# Altium PCB PCB1.PcbDoc
Units mm, origin at the board's own origin, x right, y up, seen from the top; angles counter-clockwise.
Board outline 127 x 101.6 mm, 2 copper layers (Top Layer, Bottom Layer); 84 components, 61 nets, 302 pads, 46 vias.
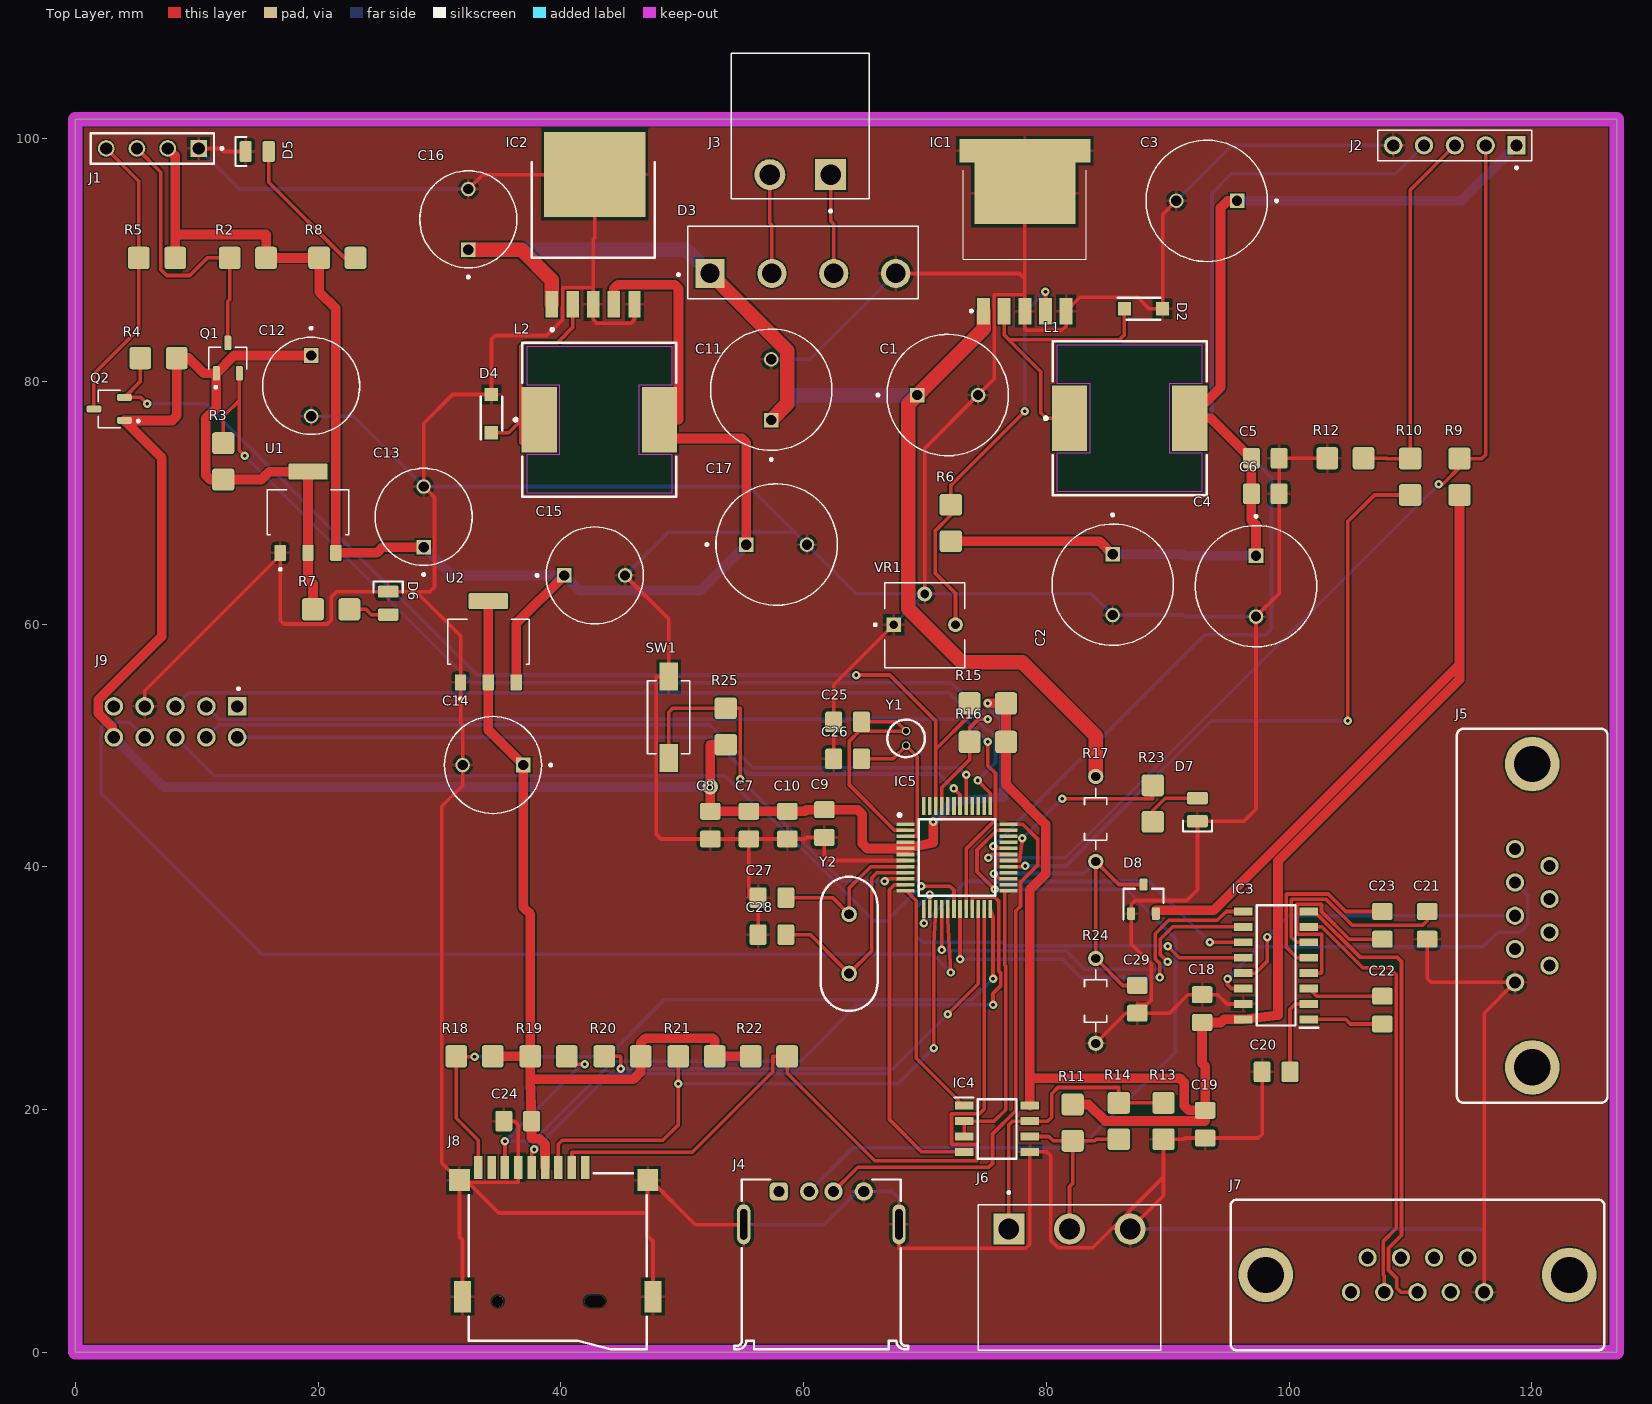
[diagram p0: Top Layer view]
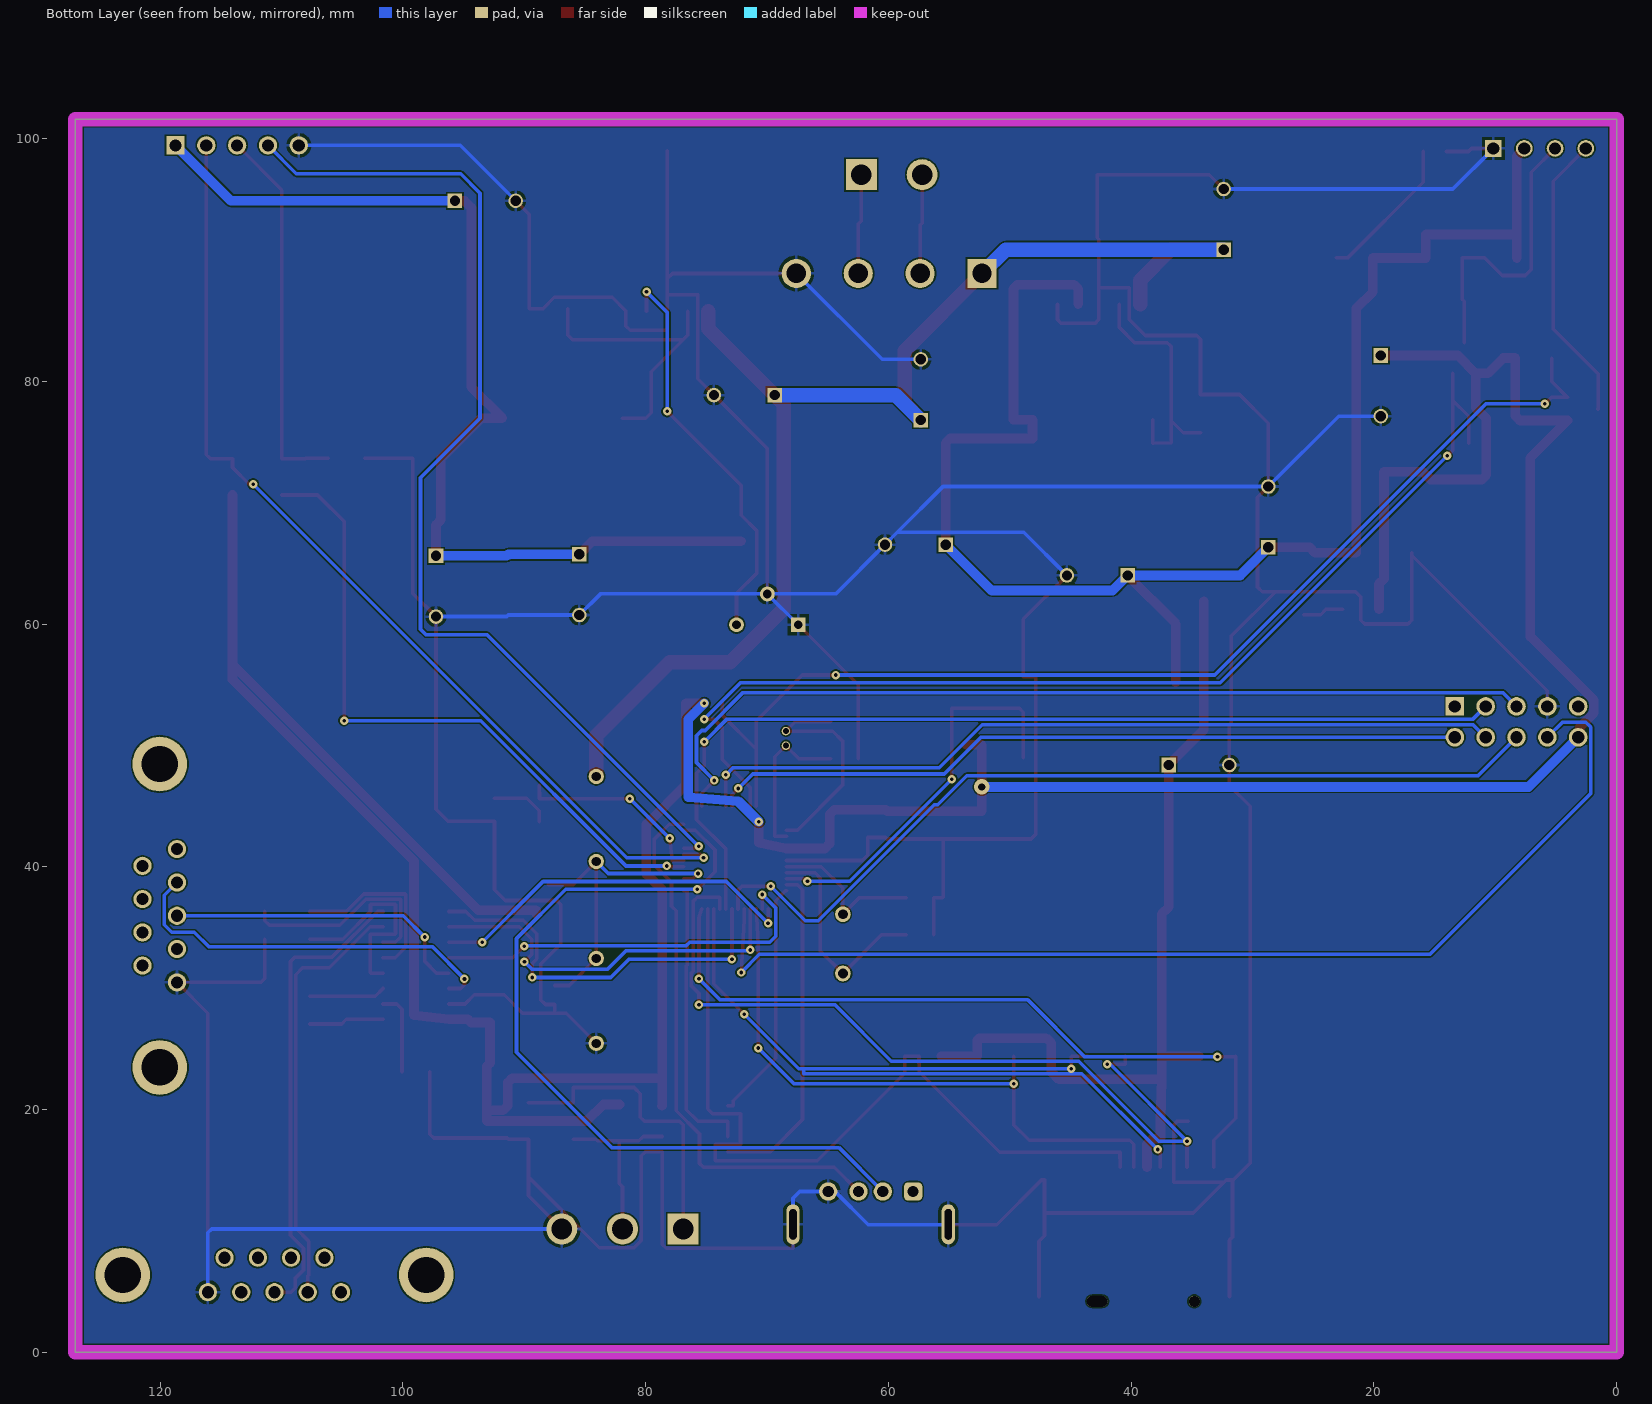
[diagram p1: Bottom Layer view, seen from below]
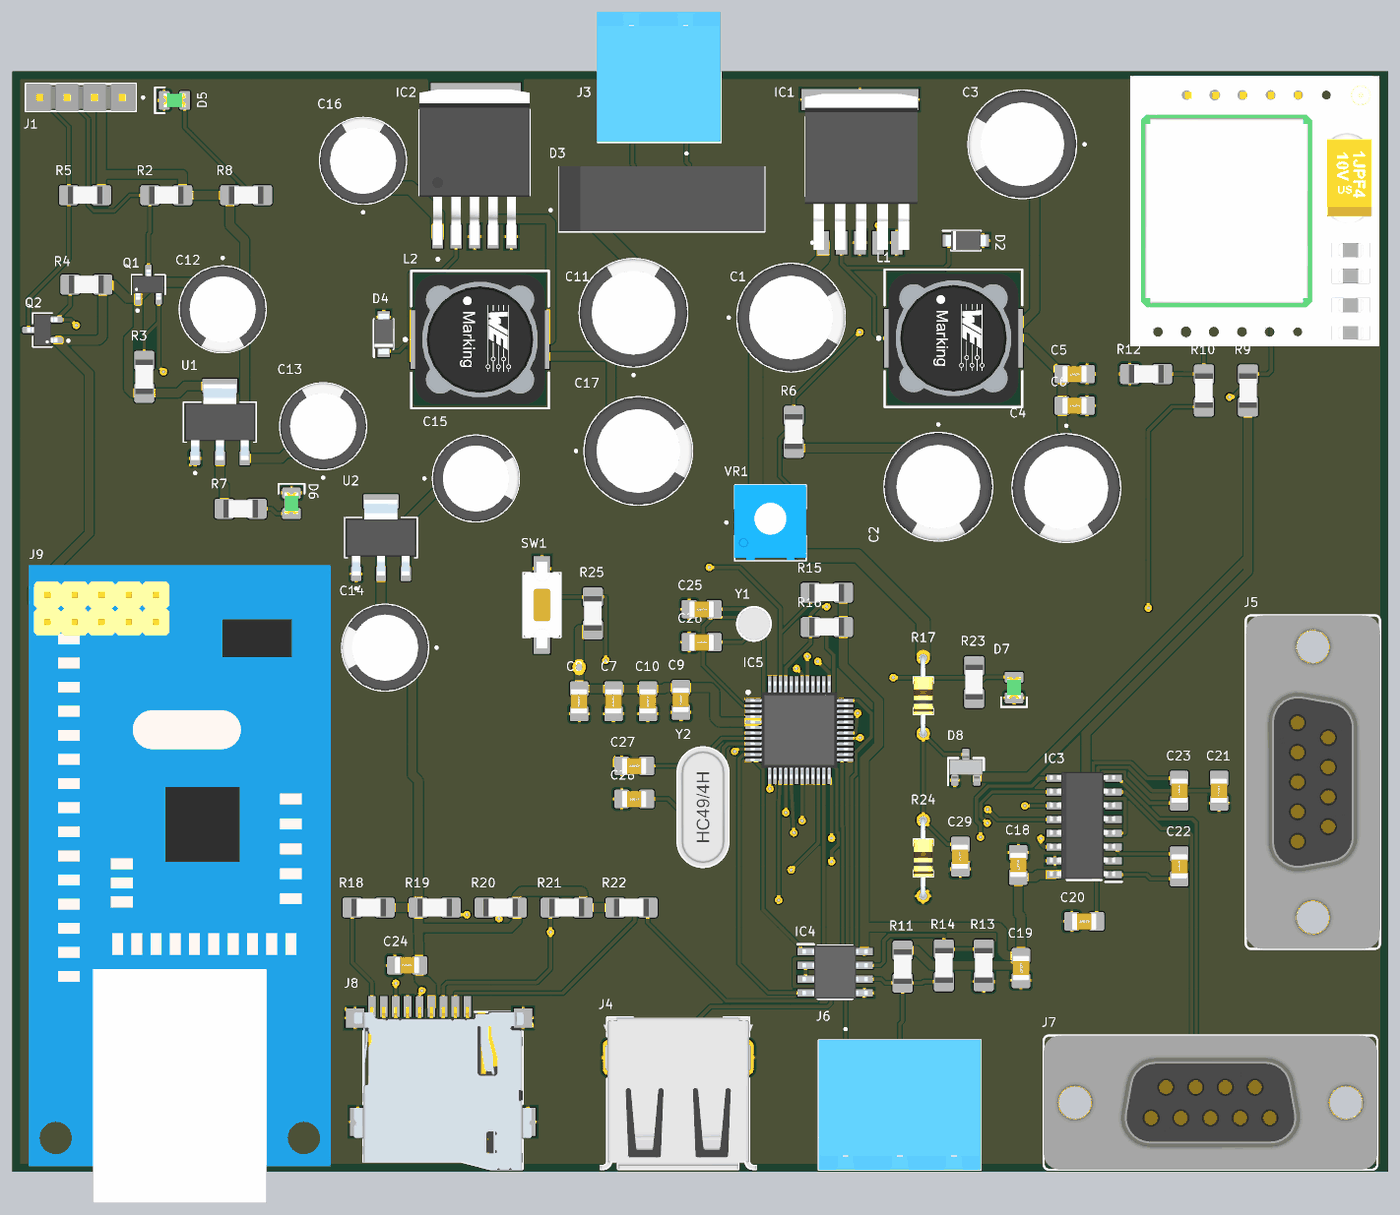
[diagram p2: 3D render of the assembled board from above, using the file's embedded part models]

## Layer stack, top to bottom
Top Solder: solder mask 0.0102, Solder Resist, Dk 3.5
Top Layer: signal copper 0.0356
Dielectric 1: dielectric 0.32, FR-4, Dk 4.8
Bottom Layer: signal copper 0.0356
Bottom Solder: solder mask 0.0102, Solder Resist, Dk 3.5

## Board outline
0,101.6 127,101.6 127,0 0,0

## Design rules (kind name [scope] priority, off if disabled: settings)
Clearance Clearance_MCU [InComponent('IC5')] p1: gap=0.05 ignorepadtopadclearanceinfootprint=TRUE except(0: Arc-Hole Track-Hole SMDPad-Hole THPad-Hole Via-Hole Fill-Hole Poly-Hole Region-Hole Text-Hole)
Clearance [All] p2: gap=0.12 ignorepadtopadclearanceinfootprint=TRUE except(0: Arc-Hole Track-Hole SMDPad-Hole THPad-Hole Via-Hole Fill-Hole Poly-Hole Region-Hole Text-Hole)
HoleSize [All] p1: absolutevalues=TRUE maxlimit=5 minlimit=0.025 maxpercent=80.000 minpercent=20.000
MinimumSolderMaskSliver [All] p1 off: minsoldermaskwidth=0.1
PolygonConnect [All] p1: connectstyle=Relief reliefconductorwidth=0.254 reliefentries=4 polygonreliefangle="90 Angle" airgapwidth=0.254
RoutingVias RoutingVias_1 [InNet('24V') OR InNet('4.3V') OR InNet('5V') OR InNet('3.3V') OR InNet('3.3V_Comm')] p1: holewidth=0.6 width=1.27 viastyle="Through Hole" minholewidth=0.6 minwidth=1.27 maxholewidth=0.6 maxwidth=1.27
RoutingVias [All] p2: holewidth=0.3 width=0.7 viastyle="Through Hole" minholewidth=0.3 minwidth=0.7 maxholewidth=0.3 maxwidth=0.7
SilkToSilkClearance [All] p1 off: silktosilkclearance=0.254
SilkToSolderMaskClearance [IsPad] p1 off: minsilkscreentomaskgap=0.1 clearancetoexposedcopper=TRUE
SolderMaskExpansion [All] p1: expansion=0.102 istentingtop=FALSE
Width Width_Power [InNet('24V')] p1: maxlimit=2 minlimit=1 preferedwidth=1.2
Width Width_Power_Med [InNet('4.3V') OR InNet('5V') OR InNet('3.3V') OR InNet('3.3V_Comm')] p2: maxlimit=1.2 minlimit=0.6 preferedwidth=0.8
Width Width_Signals [All] p3: maxlimit=0.4 minlimit=0.15 preferedwidth=0.3
Width [All] p4: maxlimit=0.4 minlimit=0.15 preferedwidth=0.254
26 further rules are at their usual default settings.

## Classes and differential pairs
component class Sheet2: C18 C19 C20 C21 C22 C23 C24 C25 C26 C27 C28 C29 D7 D8 IC3 IC4 IC5 J2 J4 J5 J6 J7 J8 J9 R9 R10 R11 R12 R13 R14 R15 R16 R17 R18 R19 R20 R21 R22 R23 R24 R25 SW1 Y1 Y2
component class Sheet1: C1 C2 C3 C4 C5 C6 C7 C8 C9 C10 C11 C12 C13 C14 C15 C16 C17 D2 D3 D4 D5 D6 IC1 IC2 J1 J3 L1 L2 Q1 Q2 R2 R3 R4 R5 R6 R7 R8 U1 U2 VR1

## Components (designator, comment, footprint, x,y, rotation, side; value= is the part's Value field where it differs from the comment)
C1 "470uF" CAPPRD500W60D1000H1600 71.882,78.867 r0 top
C2 "1000uF" CAPPRD500W60D1000H2500 85.471,63.246 r270 top
C3 "680uF" CAPPRD500W60D1000H1600 93.218,94.869 r180 top
C4 "470uF" CAPPRD500W60D1000H1600 97.282,63.119 r270 top
C5 "0.1uF" CAP_0805 98.044,73.66 r180 top
C6 "0.1uF" CAP_0805 98.044,70.739 r180 top
C7 "0.1uF" CAP_0805 55.499,43.434 r90 top
C8 "0.1uF" CAP_0805 52.324,43.434 r90 top
C9 "0.1uF" CAP_0805 61.722,43.561 r90 top
C10 "0.1uF" CAP_0805 58.674,43.434 r90 top
C11 "470uF" CAPPRD500W60D1000H1600 57.342,79.31 r90 top
C12 "220uF" CAPPRD500W60D800H1150 19.431,79.629 r270 top
C13 "220uF" CAPPRD500W60D800H1150 28.702,68.834 r90 top
C14 "220uF" CAPPRD500W60D800H1150 34.417,48.387 r180 top
C15 "220uF" CAPPRD500W60D800H1150 42.799,64.008 r0 top
C16 "220uF" CAPPRD500W60D800H1150 32.385,93.345 r90 top
C17 "680uF" CAPPRD500W60D1000H1600 57.785,66.548 r0 top
C18 "0.1uF" CAP_0805 92.837,28.321 r270 top
C19 "0.1uF" CAP_0805 93.091,18.796 r270 top
C20 "0.1uF" CAP_0805 98.933,23.114 r180 top
C21 "0.1uF" CAP_0805 111.379,35.179 r90 top
C22 "0.1uF" CAP_0805 107.696,28.194 r270 top
C23 "0.1uF" CAP_0805 107.696,35.179 r270 top
C24 "0.1uF" CAP_0805 36.449,19.05 r0 top
C25 "0.1uF" CAP_0805 63.627,51.943 r180 top
C26 "0.1uF" CAP_0805 63.627,48.895 r180 top
C27 "0.1uF" CAP_0805 57.404,37.465 r180 top
C28 "0.1uF" CAP_0805 57.404,34.417 r180 top
C29 "0.1uF" CAP_0805 87.503,29.083 r90 top
D2 "SS34LWHRVG" SODFL3718X102N 88.011,85.979 r0 top
D3 "KBL606G" SIP600W130P510L1900H1630Q4 59.944,89.789 r0 top
D4 "SS34LWHRVG" SODFL3718X102N 34.29,77.343 r90 top
D5 "GREEN" LED_0805_GREEN 14.986,98.933 r0 top
D6 "GREEN" LED_0805_GREEN 25.781,61.722 r270 top
D7 "GREEN" LED_0805_GREEN 92.456,44.704 r90 top
D8 "Schottky-Dual-Diode_Series" SOT-23 88.011,37.338 r90 top value=Schottky-Dual-Diode
IC1 "LM2596S-ADJ" LM2596SXADJ 78.232,92.327 r270 top
IC2 "LM2596S-5.0" KTT0005B 42.672,98.806 r270 top
IC3 "MAX3232ESE+" SOIC127P600X175-16N 98.933,31.877 r180 top
IC4 "MAX3485EESA+" SOIC127P600X175-8N 75.946,18.415 r0 top
IC5 "STM32G071CBT6TR" QFP50P900X900X160-48N 72.644,40.767 r0 top
J1 "MTSW-104-08-S-S-270" SAMTEC_MTSW-104-08-S-S-270 6.35,99.187 r0 top
J2 "826646-5" TE_826646-5 113.665,99.441 r180 top
J3 "TBP04R12-500-02BE" CUI_TBP04R12-500-02BE 62.23,97.028 r180 top
J4 "61410416021R" 61410416021R 61.468,7.239 r0 top
J5 "Female, Straight, 9p" 210611003 120.038,35.97 r90 top
J6 "TBP04R1-500-03BE" *CUI_TBP04R1-500-03BE 76.915,10.16 r0 top
J7 "Female, Straight, 9p" 210611003 110.588,6.373 r180 top
J8 "693071020811" 693071020811 39.751,7.493 r0 top
J9 "ZST-105-XX-X-D-XXX" SAMTEC_ZST-105-XX-X-D-XXX 8.255,51.943 r180 top
L1 "470µH" "WE-PD HV_1210" 86.868,76.962 r270 top
L2 "470µH" "WE-PD HV_1210" 43.18,76.835 r270 top
Q1 "AO3402" SOT95P280X125-3N 12.573,81.915 r90 top
Q2 "AO3402" SOT95P280X125-3N 2.794,77.724 r180 top
R2 "10k" RES_1206 14.224,90.17 r180 top
R3 "10k" RES_1206 12.192,73.406 r90 top
R4 "10k" RES_1206 6.858,81.915 r180 top
R5 "10k" RES_1206 6.731,90.17 r180 top
R6 "1k" RES_1206 72.136,68.326 r270 top
R7 "1k" RES_1206 21.082,61.214 r0 top
R8 "1k" RES_1206 21.59,90.17 r0 top
R9 "10k" RES_1206 114.046,72.136 r270 top
R10 "1k" RES_1206 109.982,72.136 r90 top
R11 "10k" RES_1206 82.169,18.923 r270 top
R12 "2.2k" RES_1206 104.648,73.66 r0 top
R13 "10k" RES_1206 89.662,19.05 r90 top
R14 "120" RES_1206 85.979,19.05 r270 top
R15 "4.7k" RES_1206 75.184,53.467 r180 top
R16 "4.7k" RES_1206 75.184,50.292 r180 top
R17 "3-1623927-1" RESAD700W45L350D185 84.074,43.942 r270 top value=100k
R18 "10k" RES_1206 32.893,24.384 r0 top
R19 "10k" RES_1206 38.989,24.384 r180 top
R20 "10k" RES_1206 45.085,24.384 r0 top
R21 "10k" RES_1206 51.181,24.384 r0 top
R22 "10k" RES_1206 57.15,24.384 r180 top
R23 "220" RES_1206 88.773,45.212 r90 top
R24 "3-1623927-1" RESAD700W45L350D185 84.074,28.956 r270 top value=10k
R25 "10k" RES_1206 53.594,51.562 r270 top
SW1 "434121043816" 434121043816 48.895,52.324 r270 top
U1 "AMS1117" SOT229P700X180-4N 19.177,69.215 r90 top
U2 "AMS1117" SOT229P700X180-4N 34.036,58.547 r90 top
VR1 "3362P-1-103" TRIM_3362P-1-103 69.977,59.944 r0 top
Y1 "32.768kHz" WE-XTAL_WATCH_D3H8.2 68.453,50.581 r90 top
Y2 "10MHz" WE-XTAL_HC49/4H 63.754,33.655 r90 top

## Footprints (in the part's own frame and the unit in brackets; to place one, negate y for a bottom-side part, rotate by r counter-clockwise, add the part's x,y. Pads: shape width x height; smd on the part's side, far side on the other; paste and mask are expansions set on the pad)
210611003 [mm] "D-SUB-Filter, Solder Pin Straight, Female, 09p"
  round 1.5 hole 1: 1(5.49,1.42) 2(2.74,1.42) 3(0,1.42) 4(-2.74,1.42) 5(-5.49,1.42) 6(4.11,-1.42) 7(1.37,-1.42) 8(-1.37,-1.42) 9(-4.11,-1.42)
  round 4.5 hole 3: M1(-12.5,0) M2(12.5,0)
  silkscreen extent -15.4,-6.2 15.4,6.2, body extent -15.4,-6.2 15.4,6.2, height 11.9
61410416021R [mm] "USB Type A Horizontal THR"
  rrect50% 1.52x1.52 hole 0.92: 1(-3.5,6.01)
  round 1.52 hole 0.92: 2(-1,6.01) 3(1,6.01) 4(3.5,6.01)
  oval 1.1x3.3 hole 0.6 slot 2.5 at 90 deg: Shell(-6.4,3.3) Shell(6.4,3.3)
  silkscreen extent -7.17,-7 7.17,7, body extent -7.22,-7 7.23,7, height 7.55
434121043816 [mm] "SMD Tact Switch, body 6x3.5mm"
  rect 2.3x1.5 smd: 1(-3.35,0) 2(3.35,0)
  silkscreen extent -3,-1.75 3,1.75, body extent -4,-1.75 4,1.75, height 4.3
693071020811 [mm] "Micro SD Card Connector Push & Push - with Card Detection - 8 Pins"
  rect 0.7x1.9 smd: 1(2.25,7.75) 2(1.15,7.75) 3(0.05,7.75) 4(-1.05,7.75) 5(-2.15,7.75) 6(-3.25,7.75) 7(-4.35,7.75) 8(-5.45,7.75) 9(-6.55,7.75)
  rect 1.7x1.8 smd: 10(-8.1,6.7) 11(7.4,6.7)
  rect 1.4x2.6 smd: 12(-7.85,-2.9) 13(7.85,-2.9)
  round 0.9 hole 0.9 unplated: MH1(-4.95,-3.3)
  oval 1.7x0.9 hole 0.9 slot 1.7 at 0 deg unplated: MH2(3.05,-3.3)
  silkscreen extent -7.35,-7.25 7.35,7.25, body extent -8.2,-7.3 8.2,7.73, height 1.85
*CUI_TBP04R1-500-03BE [mm]
  rect 2.55x2.55 hole 1.7: 1(0,0)
  round 2.55 hole 1.7: 2(5,0) 3(10,0)
  silkscreen extent -2.5,-10 12.5,3.1, body extent -2.51,-9.98 12.49,2.02, height 9.05
CAP_0805 [mm]
  rrect25% 1.4x1.7 smd: 1(-1.143,0) 2(1.143,0)
  body extent -1.15,-0.76 1.15,0.79, height 1.01
CAPPRD500W60D800H1150 [mm]
  round 1.2 hole 0.85: N(2.5,0)
  rect 1.2x1.2 hole 0.85: P(-2.5,0)
  silkscreen extent -4.85,-4 4,4, body extent -4,-4 4,4, height 11.5
CAPPRD500W60D1000H1600 [mm]
  round 1.2 hole 0.85: N(2.5,0)
  rect 1.2x1.2 / inner round 1.2 / far side rect 1.2x1.2 hole 0.85: P(-2.5,0)
  silkscreen extent -5.85,-5 5,5, body extent -5,-5 5,5, height 16
CAPPRD500W60D1000H2500 [mm]
  round 1.2 hole 0.85: N(2.5,0)
  rect 1.2x1.2 hole 0.85: P(-2.5,0)
  silkscreen extent -5.85,-5 5,5, body extent -5,-5 5,5, height 25
CUI_TBP04R12-500-02BE [mm]
  rect 2.55x2.55 / inner round 2.55 / far side rect 2.55x2.55 hole 1.7: 1(0,0)
  round 2.55 hole 1.7: 2(5,0)
  silkscreen extent -3.2,-10 8.2,3.1, body extent -3.11,-10.06 8.29,1.93, height 9.25
KTT0005B [mm]
  rect 2.16x1.02 smd: 1(12.461,-3.4) 2(12.461,-1.7) 3(12.461,0) 4(12.461,1.7) 5(12.461,3.4)
  rect 6.99x8.33 smd: 6(1.778,0.127)
  silkscreen extent 0.76,-5.08 14.68,5.08, body extent -1.11,-5.08 13.24,5.08, height 4.72
LED_0805_GREEN [mm]
  rrect25% 1x1.7 smd: A(0.95,0) K(-0.95,0)
  silkscreen extent -1.8,-1.2 -0.9,1.2, body extent -1,-0.63 1,0.63, height 1.12
LM2596SXADJ [mm]
  rect 2.16x1.07 smd: 1(6.545,-3.4) 2(6.545,-1.7) 3(6.545,0) 4(6.545,1.7) 5(6.545,3.4)
  rect 1.91x10.8 smd: T1(-6.67,0)
  rect 5.08x8.33 smd: T2(-3.175,0)
  silkscreen extent -5.06,-5.08 6.64,5.08, body extent -7.2,-5.07 7.19,5.34, height 4.8
QFP50P900X900X160-48N [mm]
  rect 1.475x0.3 smd: 1(-4.238,2.75) 2(-4.238,2.25) 3(-4.238,1.75) 4(-4.238,1.25) 5(-4.238,0.75) 6(-4.238,0.25) 7(-4.238,-0.25) 8(-4.238,-0.75) 9(-4.238,-1.25) 10(-4.238,-1.75) 11(-4.238,-2.25) 12(-4.238,-2.75) 25(4.238,-2.75) 26(4.238,-2.25) 27(4.238,-1.75) 28(4.238,-1.25) 29(4.238,-0.75) 30(4.238,-0.25) 31(4.238,0.25) 32(4.238,0.75) 33(4.238,1.25) 34(4.238,1.75) 35(4.238,2.25) 36(4.238,2.75)
  rect 0.3x1.475 smd: 13(-2.75,-4.238) 14(-2.25,-4.238) 15(-1.75,-4.238) 16(-1.25,-4.238) 17(-0.75,-4.238) 18(-0.25,-4.238) 19(0.25,-4.238) 20(0.75,-4.238) 21(1.25,-4.238) 22(1.75,-4.238) 23(2.25,-4.238) 24(2.75,-4.238) 37(2.75,4.238) 38(2.25,4.238) 39(1.75,4.238) 40(1.25,4.238) 41(0.75,4.238) 42(0.25,4.238) 43(-0.25,4.238) 44(-0.75,4.238) 45(-1.25,4.238) 46(-1.75,4.238) 47(-2.25,4.238) 48(-2.75,4.238)
  silkscreen extent -4.85,-3.15 3.15,3.62, body extent -4.5,-4.5 4.5,4.5, height 1.6
RES_1206 [mm]
  rrect25% 1.8x1.84 smd: 1(-1.5,0) 2(1.5,0)
  body extent -1.6,-0.83 1.6,0.83, height 0.57
RESAD700W45L350D185 [mm]
  round 1.258 hole 0.75: 1(-3.5,0) 2(3.5,0)
  silkscreen extent -2.55,-0.93 2.55,0.93, body extent -3.72,-0.92 3.72,0.92, height 1.85
SAMTEC_MTSW-104-08-S-S-270 [mm]
  rect 1.37x1.37 / inner round 1.37 / far side rect 1.37x1.37 hole 1.02: 01(3.81,0)
  round 1.37 hole 1.02: 02(1.27,0) 03(-1.27,0) 04(-3.81,0)
  silkscreen extent -5.08,-1.27 5.83,1.27, body extent -5.08,-1.27 5.08,1.27, height 9.4
SAMTEC_ZST-105-XX-X-D-XXX [mm]
  rect 1.53x1.53 / inner round 1.53 / far side rect 1.53x1.53 hole 1.02 mask+0.102: 01(-5.08,-1.27)
  round 1.53 hole 1.02 mask+0.102: 02(-5.08,1.27) 03(-2.54,-1.27) 04(-2.54,1.27) 05(0,-1.27) 06(0,1.27) 07(2.54,-1.27) 08(2.54,1.27) 09(5.08,-1.27) 10(5.08,1.27)
  silkscreen extent -5.3,-2.83 -5.1,-2.63, body extent -21.17,-4.06 6.73,54.84, height 15.56
SIP600W130P510L1900H1630Q4 [mm]
  round 2.4 hole 1.6: AC1(-2.55,-0.9) AC2(2.55,-0.9) NEG(7.65,-0.9)
  rect 2.4x2.4 hole 1.6: POS(-7.65,-0.9)
  silkscreen extent -10.35,-3 9.5,3, body extent -9.5,-2.95 9.5,3.05, height 16.3
SODFL3718X102N [mm]
  rect 1.09x1.11 smd: 1(-1.575,0) 2(1.575,0)
  silkscreen extent -2.12,-0.9 1.38,0.9, body extent -1.85,-0.9 1.85,0.9, height 1.02
SOIC127P600X175-8N [mm]
  rect 1.525x0.65 smd: 1(-2.712,1.905) 2(-2.712,0.635) 3(-2.712,-0.635) 4(-2.712,-1.905) 5(2.712,-1.905) 6(2.712,-0.635) 7(2.712,0.635) 8(2.712,1.905)
  silkscreen extent -3.47,-2.45 1.6,2.58, body extent -3,-2.45 3,2.45, height 1.75
SOIC127P600X175-16N [mm]
  rect 1.525x0.65 smd: 1(-2.712,4.445) 2(-2.712,3.175) 3(-2.712,1.905) 4(-2.712,0.635) 5(-2.712,-0.635) 6(-2.712,-1.905) 7(-2.712,-3.175) 8(-2.712,-4.445) 9(2.712,-4.445) 10(2.712,-3.175) 11(2.712,-1.905) 12(2.712,-0.635) 13(2.712,0.635) 14(2.712,1.905) 15(2.712,3.175) 16(2.712,4.445)
  silkscreen extent -3.48,-4.95 1.6,5.12, body extent -2.84,-5.03 3.16,4.87, height 1.73
SOT95P280X125-3N [mm]
  rrect50% 1.21x0.59 smd: 1(-1.255,0.95) 2(-1.255,-0.95) 3(1.255,0)
  silkscreen extent -2.5,-1.56 0.9,1.56, body extent -1.4,-1.45 1.4,1.45, height 1.25
SOT229P700X180-4N [mm]
  rrect15% 1.31x0.93 smd: 1(-3.345,2.29) 2(-3.345,0) 3(-3.345,-2.29)
  rrect15% 1.31x3.24 smd: 4(3.345,0)
  silkscreen extent -4.8,-3.36 1.86,3.36, body extent -3.5,-3.25 3.5,3.25, height 1.8
SOT-23 [mm] "SOT23, 3-Leads, IPC Medium Density, TO-236"
  rrect25% 1x0.65 smd: 1(-1.2,1.02) 2(-1.2,-1.02) 3(1.2,0)
  silkscreen extent -1.65,-1.65 0.85,1.65, body extent -1.3,-1.52 1.3,1.52, height 1.3
TE_826646-5 [mm]
  rect 1.508x1.508 / inner round 1.508 / far side rect 1.508x1.508 hole 1: 1(-5.08,0)
  round 1.508 hole 1: 2(-2.54,0) 3(0,0) 4(2.54,0) 5(5.08,0)
  silkscreen extent -6.35,-1.25 6.35,1.95, body extent -12.52,-1.78 10.48,23.24, height 7.28
TRIM_3362P-1-103 [mm]
  rect 1.222x1.222 / inner round 1.222 / far side rect 1.222x1.222 hole 0.714: 1(-2.54,0)
  round 1.222 hole 0.714: 2(0,2.54) 3(2.54,0)
  silkscreen extent -4.16,-3.53 3.3,3.47, body extent -3.3,-3.49 3.3,3.49, height 4.88
"WE-PD HV_1210" [mm] "SMT High Voltage Power Inductor, 2-Leads, body 12.00x12.00mm"
  rect 5.4x2.9 smd: 1(0,-4.95) 2(0,4.95)
  Top Layer keep-out region: -6,6 -6,-6 -2.9,-6 -2.9,-3.3 2.9,-3.3 2.9,-6 6,-6 6,6 2.9,6 2.9,3.3 -2.9,3.3 -2.9,6
  silkscreen extent -6.35,-7.02 6.35,6.35, body extent -6,-6 6,6, height 9.7
WE-XTAL_HC49/4H [mm] "Quartz Crystal, size HC49/4H, body 11.05x4.7mm"
  round 1.3 hole 0.8: 1(-2.44,0) 2(2.44,0)
  silkscreen extent -5.53,-2.35 5.53,2.35, body extent -5.52,-2.35 5.53,2.35, height 4.15
WE-XTAL_WATCH_D3H8.2 [mm] "Quartz Crystal, size WATCH, body diameter 3mm"
  round 0.7 hole 0.5: 1(-0.6,0) 2(0.6,0)
  silkscreen extent -1.55,-1.55 1.55,1.55, body extent -1.5,-1.49 1.5,1.49, height 8.25

## Part data
C1 C3 C4 C11 C17: library part EEUHD1V681B, "CAP ALUM 680UF 20% 35V RADIAL", Package="RADIAL-2 Panasonic", Availability="In Stock", Check_prices=https://www.snapeda.com/parts/EEU-HD1V681B/Panasonic/view-part/?ref=eda, MF=Panasonic, MP=EEU-HD1V681B, Price=None, Purchase-URL=https://pricing.snapeda.com/search?q=EEU-HD1V681B&ref=eda, SnapEDA_Link=https://www.snapeda.com/parts/EEU-HD1V681B/Panasonic/view-part/?ref=snap
C2: library part EEUFS1V102L, "1000ÂµF 35V Aluminum Electrolytic Capacitors Radial, Can 10000 Hrs @ 105Â°C", Package="RADIAL-2 Panasonic", Availability="In Stock", Check_prices=https://www.snapeda.com/parts/EEUFS1V102L/Panasonic/view-part/?ref=eda, MF=Panasonic, MP=EEUFS1V102L, Price=None, Purchase-URL=https://pricing.snapeda.com/search/part/EEUFS1V102L/?ref=eda, SnapEDA_Link=https://www.snapeda.com/parts/EEUFS1V102L/Panasonic/view-part/?ref=snap
C5 C6 C7 C8 C9 C10 C18 C19 C20 C21 C22 C23 C24 C25 C26 C27 C28 C29: library part CAP_0805, "Capacitor SMD 0805"
C12 C13 C14 C15 C16: library part EEUHD1V221B, "Cap Aluminum 220uF 35V 20% (8 X 11.5mm) Radial 5mm 270mA 1000 hr 105C Ammo Pack", Package="RADIAL-2 Panasonic", Availability="In Stock", Check_prices=https://www.snapeda.com/parts/EEU-HD1V221B/Panasonic/view-part/?ref=eda, MF=Panasonic, MP=EEU-HD1V221B, Price=None, Purchase-URL=https://pricing.snapeda.com/search/part/EEU-HD1V221B/?ref=eda, SnapEDA_Link=https://www.snapeda.com/parts/EEU-HD1V221B/Panasonic/view-part/?ref=snap
D2 D4: "Diode", Manufacturer_Name="Taiwan Semiconductor", Mouser Part Number=821-SS34LWHRVG, Arrow Part Number=SS34LWHRVG, Arrow Price/Stock=https://www.arrow.com/en/products/ss34lwhrvg/taiwan-semiconductor?region=asia, Datasheet Link=https://datasheet.datasheetarchive.com/originals/distributors/DKDS-20/389381.pdf, Height=1.02mm, Manufacturer_Part_Number=SS34LWHRVG, Mouser Price/Stock=https://www.mouser.co.uk/ProductDetail/Taiwan-Semiconductor/SS34LWHRVG?qs=5aG0NVq1C4zYvYQjFNyRbA%3D%3D
D3: Package=None, Availability=Unavailable, MP=KBL606G, Price=None
D5 D6 D7: library part LED_0805_GREEN, "LED 0805 GREEN SMD"
IC1: "Integrated Circuit", Manufacturer_Name="Texas Instruments", Mouser Part Number=926-LM2596S-ADJ, Datasheet Link=https://www.ti.com/lit/ds/symlink/lm2596.pdf?HQS=ti-null-null-sf-df-pf-sep-wwe&ts=1592978195629, Height=4.57mm, Manufacturer_Part_Number=LM2596S-ADJ, Mouser Price/Stock=https://www.mouser.co.uk/ProductDetail/Texas-Instruments/LM2596S-ADJ?qs=X1J7HmVL2ZGmRmhAtwKZ2Q%3D%3D
IC2: "Integrated Circuit", Manufacturer_Name="Texas Instruments", Mouser Part Number=926-LM2596S-50, Arrow Part Number=LM2596S-5.0, Arrow Price/Stock=https://www.arrow.com/en/products/lm2596s-5.0/texas-instruments?region=nac, Datasheet Link=https://www.ti.com/lit/gpn/LM2596, Manufacturer_Part_Number=LM2596S-5.0, Mouser Price/Stock=https://www.mouser.co.uk/ProductDetail/Texas-Instruments/LM2596S-5.0?qs=X1J7HmVL2ZGcOr96VNr%252B%2Fw%3D%3D
IC3: "Integrated Circuit", Manufacturer_Name="Analog Devices", Mouser Part Number=700-MAX3232ESE, Arrow Part Number=MAX3232ESE+, Arrow Price/Stock=https://www.arrow.com/en/products/max3232ese/analog-devices?region=asia, Datasheet Link=https://www.mouser.com/datasheet/2/256/MAX3222-MAX3241-1292123.pdf, Height=1.75mm, Manufacturer_Part_Number=MAX3232ESE+, Mouser Price/Stock=https://www.mouser.co.uk/ProductDetail/Analog-Devices-Maxim-Integrated/MAX3232ESE%2b?qs=1THa7WoU59GfcUr9ieNstA%3D%3D
IC4: "Integrated Circuit", Manufacturer_Name="Analog Devices", Mouser Part Number=700-MAX3485EESA, Arrow Part Number=MAX3485EESA+, Arrow Price/Stock=https://www.arrow.com/en/products/max3485eesa/analog-devices?utm_currency=USD&region=nac, Datasheet Link=https://datasheet.datasheetarchive.com/originals/distributors/Datasheets-18/DSA-341145.pdf, Height=1.75mm, Manufacturer_Part_Number=MAX3485EESA+, Mouser Price/Stock=https://www.mouser.co.uk/ProductDetail/Analog-Devices-Maxim-Integrated/MAX3485EESA%2b?qs=1THa7WoU59HLsdsozrMCeQ%3D%3D
IC5: "Integrated Circuit", Manufacturer_Name=STMicroelectronics, Mouser Part Number=511-STM32G071CBT6TR, Arrow Part Number=STM32G071CBT6TR, Arrow Price/Stock=https://www.arrow.com/en/products/stm32g071cbt6tr/stmicroelectronics?region=nac, Datasheet Link=https://www.st.com/resource/en/datasheet/stm32g071cb.pdf, Height=1.6mm, Manufacturer_Part_Number=STM32G071CBT6TR, Mouser Price/Stock=https://www.mouser.co.uk/ProductDetail/STMicroelectronics/STM32G071CBT6TR?qs=l7cgNqFNU1gody9j5I9dSQ%3D%3D
J1: "Connector Header Through Hole 4 position 0.100 (2.54mm)", Package=None, Check_prices=https://www.snapeda.com/parts/MTSW-104-08-S-S-270/Samtec/view-part/?ref=eda, MF=Samtec, MP=MTSW-104-08-S-S-270, SnapEDA_Link=https://www.snapeda.com/parts/MTSW-104-08-S-S-270/Samtec/view-part/?ref=snap
J2: "Board-To-Board Connector, Through Hole, Header, 5, 2.54 mm, Gold Plated Contacts", Package=None, Check_prices=https://www.snapeda.com/parts/826646-5/TE+Connectivity+AMP+Connectors/view-part/?ref=eda, EU_RoHS_Compliance=Compliant, MF="TE Connectivity", MP=826646-5, SnapEDA_Link=https://www.snapeda.com/parts/826646-5/TE+Connectivity+AMP+Connectors/view-part/?ref=snap
J3: "2~24 Poles, Pluggable, Receptacle, Horizontal, 5.0 Pitch, Terminal Block Connector", Package=None, Check_prices=https://www.snapeda.com/parts/TBP04R12-500-02BE/Same+Sky/view-part/?ref=eda, MF="Same Sky", MP=TBP04R12-500-02BE, SnapEDA_Link=https://www.snapeda.com/parts/TBP04R12-500-02BE/Same+Sky/view-part/?ref=snap
J4: "WR-COM USB 2.0 Type A Horizontal THR", Manufacturer="Wurth Elektronik", Max Operating Temperature=85°C, Min Operating Temperature=-55°C, Rated Current=1.5A, Working Voltage="30V (AC)", Application="USB 2.0", Category="Input/Output Connectors", ComponentLink1Description="Website Link", ComponentLink1URL=https://www.we-online.com/redexpert/article/61410416021R?ad, ComponentLink2Description="Datasheet Link", ComponentLink2URL=https://www.we-online.com/redexpert/spec/61410416021R?ad, Gender=Receptacle, Interface Type="Type A", Manufacturer Part Number=61410416021R, Match Code=WR-USB, Mount="Surface Mount", Number of Pins=4, Number of Ports=1, Orientation=Horizontal, Packaging="Tape and Reel"
J5 J7: library part 210611003, "WE-D-SUB Filter Connector, THT, Straight, Female, 9p", Insulation Resistance min.=1000MOhm, Manufacturer="Wurth Elektronik", Operating Temperature="-55 to +125degC", Rated Current=5A, Rated Voltage=100VDC, Withstand Voltage=250Vrms, ComponentLink1Description=Manufacturer, ComponentLink1URL=http://www.we-online.de, ComponentLink2Description=Datasheet, ComponentLink2URL=https://www.we-online.com/catalog/datasheet/210611003.pdf, Gender=Female, Manufacturer Part Number=210611003, Mounting Technology=THT, Orientation=Straight, Packaging=Tray, Pin Number=9, Published Date="April 2020"
J8: "WR-CRD SD Card Connector Push & Push Socket, 8 pins", Manufacturer="Wurth Elektronik", Max Operating Temperature="85 °C", Min Operating Temperature="-40 °C", Application="Micro SD Card", Category="Input/Output Connector", ComponentLink1Description="Website Link", ComponentLink1URL=https://www.we-online.com/redexpert/article/693071020811?ad, ComponentLink2Description="Datasheet Link", ComponentLink2URL=https://www.we-online.com/redexpert/spec/693071020811?ad, Durability="10000 Mating cycles", Gender=Socket, Manufacturer Part Number=693071020811, Match Code=WR-CRD, Mount="Surface Mount", Number of Pins=8, Packaging="Tape and Reel", Type="Push & Push"
J9: "HEADER, 10 CONTACTS, 2 ROWS, THROUGH HOLE, 2.54 MM; Connector Systems:Wire-to-Board; Pitch Spacing:2.54mm; No. of Rows:2Rows; No. of Contacts:10Contacts; Contact Termination Type:Through Hole; Product Range:Flex Stack ZST Series RoHS Compliant: Yes", Package=None, Check_prices=https://www.snapeda.com/parts/ZST10501FD450/Samtec/view-part/?ref=eda, MF=Samtec, MP=ZST10501FD450, SnapEDA_Link=https://www.snapeda.com/parts/ZST10501FD450/Samtec/view-part/?ref=snap
L1 L2: library part 7687709102, "WE-PD HV High Voltage Power Inductor, SMT, size 1210, 1000µH, 0.72A, 1.4Ω", Case/Size Code=1210, DC Resistance=1.2Ω, DC Resistance Max=1.4Ω, Inductance=1000µH, Manufacturer="Wurth Elektronik", Max Operating Temperature=125°C, Min Operating Temperature=-40°C, Operating Voltage (DC)=400V, Rated Current=0.72A, Saturation Current=0.9A, Self Resonant Frequency=1.2MHz, Category="Power Inductors", ComponentLink1Description="Website Link", ComponentLink1URL=https://www.we-online.com/redexpert/article/7687709102?ad, ComponentLink2Description="Datasheet Link", ComponentLink2URL=https://www.we-online.com/redexpert/spec/7687709102?ad, Height=10.5mm, Length=12mm, Manufacturer Part Number=7687709102, Match Code="WE-PD HV", Mount="Surface Mount", Packaging="Tape and Reel", Width=12mm
Q1 Q2: "N-Channel 30 V 4A (Ta) 1.4W (Ta) Surface Mount SOT-23-3", Package="SOT-23 Alpha &amp; Omega Semiconductor", Check_prices=https://www.snapeda.com/parts/AO3402/Alpha/view-part/?ref=eda, MF="Alpha & Omega Semiconductor", MP=AO3402, SnapEDA_Link=https://www.snapeda.com/parts/AO3402/Alpha/view-part/?ref=snap
R2 R3 R4 R5 R6 R7 R8 R9 R10 R11 R12 R13 R14 R15 R16 R18 R19 R20 R21 R22 R23 R25: library part RES_1206, "Resistor SMD 1206"
R17 R24: "1 MOhms Â±5% 1W, 1/4W Through Hole Resistor Axial - Carbon Film", Package=None, Availability="In Stock", Check_prices=https://www.snapeda.com/parts/3-1623927-1/TE+Connectivity/view-part/?ref=eda, MF="TE Connectivity", MP=3-1623927-1, Price=None, SnapEDA_Link=https://www.snapeda.com/parts/3-1623927-1/TE+Connectivity/view-part/?ref=snap
SW1: "WS-TASV SMT Tact Switch, 6mm x 3.5mm x 4.3mm, SPST-NO, 160gf, 12V, 50mA", Manufacturer="Wurth Elektronik", Max Operating Temperature=85°C, Min Operating Temperature=-40°C, Rated Current=50mA, Rated Voltage (DC)=12V, Category="Tact Switch", Circuit=SPST-NO, ComponentLink1Description="Website Link", ComponentLink1URL=https://www.we-online.com/redexpert/article/434121043816?ad, ComponentLink2Description="Datasheet Link", ComponentLink2URL=https://www.we-online.com/redexpert/spec/434121043816?ad, Contact Material="Stainless Steel", Contact Plating=Silver, Height=4.3mm, Length=6mm, Manufacturer Part Number=434121043816, Match Code=WS-TASV, Mount="Surface Mount", Operation Force=160gf, Packaging="Tape and Reel", Terminal Material="Copper Alloy", Terminal Plating=Silver, Washable=No, Width=3.5mm
U1 U2: "1A LOW DROPOUT VOLTAGE REGULATOR SOT-223", Package="SOT-223 Seeed Technology", Check_prices=https://www.snapeda.com/parts/AMS1117/Advanced+Monolithic+Systems/view-part/?ref=eda, MF="Advanced Monolithic Systems", MP=AMS1117, SnapEDA_Link=https://www.snapeda.com/parts/AMS1117/Advanced+Monolithic+Systems/view-part/?ref=snap
VR1: "TRIMMER - 1/4in SQ ST CERMET", Package="3362P-1 Bourns Inc.", Check_prices=https://www.snapeda.com/parts/3362P-1-103/Bourns/view-part/?ref=eda, MF=Bourns, MP=3362P-1-103, SnapEDA_Link=https://www.snapeda.com/parts/3362P-1-103/Bourns/view-part/?ref=snap
Y1: library part 830002995B, "WE-XTAL Watch Crystal, WATCH, 32.768kHz, +/-20ppm", Case/Size Code=WATCH, Frequency Tolerance=+/-20ppm, Load Capacitance=12.5pF, Manufacturer="Wurth Elektronik", Max Operating Temperature=85°C, Min Operating Temperature=-40°C, Application="Real Time Clock", Category=Crystals, ComponentLink1Description="Website Link", ComponentLink1URL=https://www.we-online.com/redexpert/article/830002995B?ad, ComponentLink2Description="Datasheet Link", ComponentLink2URL=https://www.we-online.com/redexpert/spec/830002995B?ad, Diameter=3mm, Frequency=32.768kHz, Height=8.2mm, Manufacturer Part Number=830002995B, Match Code=WE-XTAL, Mount="Through Hole", Packaging=Bulk
Y2: library part 830003169B, "WE-XTAL Quartz Crystal, HC49/4H, 10MHz, +/-30ppm", Case/Size Code=HC49/4H, Frequency Stability=50ppm, Frequency Tolerance=+/-30ppm, Load Capacitance=30pF, Manufacturer="Wurth Elektronik", Max Operating Temperature=70°C, Min Operating Temperature=-20°C, Application="Processor, Ethernet", Category=Crystals, ComponentLink1Description="Website Link", ComponentLink1URL=https://www.we-online.com/redexpert/article/830003169B?ad, ComponentLink2Description="Datasheet Link", ComponentLink2URL=https://www.we-online.com/redexpert/spec/830003169B?ad, Frequency=10MHz, Height=4mm, Length=11.35mm, Manufacturer Part Number=830003169B, Match Code=WE-XTAL, Mount="Through Hole", Packaging=Bulk, Width=4.85mm
D8: Datasheet=https://diotec.com/request/datasheet/bat54.pdf, ki_description="Dual Schottky Diode in Series", ki_keywords="Dual Schottky Diode Series", Reference=D
J6: Check_prices=https://www.snapeda.com/parts/TBP04R1-500-03BE/Same+Sky/view-part/?ref=eda, SnapEDA_Link=https://www.snapeda.com/parts/TBP04R1-500-03BE/Same+Sky/view-part/?ref=snap

## Via types
v1: diameter 0.7, hole 0.3, Top Layer to Bottom Layer, 45 vias
v2: diameter 1.27, hole 0.6, Top Layer to Bottom Layer, 1 vias

## Nets (pads, with @x,y where several pads share a name; then routed paths per layer and width w, separated by ;. In a path a pad name is that pad's centre, name@x,y a point inside that pad or via, vN(x,y) a via of type N, cw(c..) or ccw(c..) an arc to the next point about the centre after c; other vN are vias at no path point)
3.3V: C7.2 C8.2 C9.2 C10.2 C12.P C18.2 C19.1 D8.2 IC3.16 IC4.8 IC5.4 IC5.5 IC5.6 J9.10 Q1.1 Q2.1 R3.1 R4.1 R7.1 R9.2 R11.1 R15.1 R16.1 R25.2 U1.2 U1.4 | length 338
  Top Layer w0.8: J9.10 3.035,50.813 3.035,51.535 1.89,52.681 1.89,53.745 7.112,58.967 7.112,73.711 Q2.1 ; Q2.1@4.064,76.774 7.98,76.774 8.358,77.153 R4.1 9.347,81.915 10.602,80.66 Q1.1 ; C12.P 13.092,82.129 Q1.1 ; R7.1 19.582,63.322 19.177,63.727 U1.2 U1.4 15.996,72.56 15.342,71.906 R3.1 11.112,71.906 10.744,72.274 10.744,76.937 11.623,77.815 Q1.1 ; R25.2 52.349,50.062 52.324,50.037 v2(52.324,46.584) C8.2 C7.2 C10.2 60.122,44.577 60.249,44.704 C9.2 64.453,44.704 64.846,44.31 64.846,41.91 65.239,41.517 IC5.5 68.507,41.538 70.688,42 v1(70.688,43.713) ; v1(75.184,53.467) R15.1 R16.1 76.684,46.767 79.954,43.497 79.954,39.395 78.638,38.08 78.638,22.581 ; IC4.8 78.638,20.32 78.638,22.581 ; R11.1 83.488,20.423 84.861,19.05 93.066,19.05 93.091,19.075 C19.1 ; D8.2 89.031,36.424 93.802,36.424 114.046,56.667 ; R9.2 114.046,56.667 ; 78.638,22.581 91.008,22.581 91.364,22.225 91.364,20.32 91.745,19.939 C19.1 ; C19.1 93.091,23.571 92.837,23.825 C18.2 94.386,27.178 94.64,27.432 IC3.16 99.092,27.781 99.092,40.488 114.046,55.442 114.046,56.667
  Bottom Layer w0.8: J9.10 7.264,46.584 v2(52.324,46.584) ; v1(70.688,43.713) 72.377,45.402 76.505,45.72 76.505,52.146 v1(75.184,53.467)
3.3V_Comm: C14.P C24.2 J8.4 R18.2 R19.2 R20.2 R21.2 R22.2 U2.2 U2.4 | length 74.3
  Top Layer w0.8: U2.4 U2.2 34.036,51.268 C14.P 36.917,36.665 37.489,36.093 R19.2 ; R18.2 R19.2 ; J8.4 38.701,17.145 38.261,17.585 37.685,17.585 37.592,17.678 C24.2 37.489,22.493 ; R22.2 R21.2 52.681,25.717 52.514,25.884 46.99,25.884 46.585,25.479 R20.2 46.585,23.103 45.976,22.493 37.489,22.493 ; 37.489,22.493 R19.2
4.3V: C2.P C3.P C4.P C5.2 C6.2 J2.1 L1.2 R6.2 | length 85.2
  Top Layer w0.8: R6.2 84.391,66.826 C2.P ; C3.P 94.932,94.869 94.361,94.297 94.361,79.505 L1.2 93.548,76.962 96.85,73.66 C5.2 C6.2 96.901,68.555 97.282,68.174 C4.P
  Bottom Layer w0.8: C2.P 91.313,65.746 91.44,65.619 C4.P ; C3.P 114.173,94.869 J2.1
5V: C13.P C15.P C17.P IC2.4 J1.02 L2.2 R2.1 R5.1 R8.1 U1.3 U2.3 | length 132
  Top Layer w0.8: J1.02 8.231,98.576 8.231,91.757 ; R5.1 8.231,91.757 ; C13.P 25.305,66.334 24.841,65.87 U1.3 21.467,86 20.09,87.377 R8.1 R2.1 15.724,92.075 15.71,92.089 8.563,92.089 8.231,91.757 ; U2.3 36.326,60.035 C15.P ; IC2.4 44.372,87.63 44.702,87.96 49.378,87.96 49.708,87.63 49.708,76.86 49.682,76.835 L2.2 48.13,75.286 54.929,75.286 55.285,74.93 C17.P
  Bottom Layer w0.8: C13.P 31.028,64.008 C15.P 41.544,62.763 51.5,62.763 C17.P
24V: C1.P C11.P C16.P D3.POS IC1.1 IC2.1 R17.1 | length 109
  Top Layer w1.2: C16.P 36.765,90.845 39.272,88.338 IC2.1 ; D3.POS 58.674,82.509 58.674,78.142 C11.P ; IC1.1 74.832,84.317 C1.P 68.631,78.116 68.631,61.265 73.025,56.871 78.003,56.871 84.074,50.8 R17.1
  Bottom Layer w1.2: C16.P 50.338,90.845 D3.POS ; C11.P 59.399,78.867 C1.P
ETH_CS: IC5.41 J9.04 | length 67.3
  Top Layer w0.3: IC5.41 v1(73.394,47.574)
  Bottom Layer w0.3: J9.04 11.836,51.714 52.272,51.714 55.828,48.158 72.81,48.158 v1(73.394,47.574)
ETH_INT: IC5.20 J9.03 | length 80.6
  Top Layer w0.3: IC5.20 73.394,41.463 75.814,43.883 75.814,47.706 75.184,48.336 v1(75.184,50.292)
  Bottom Layer w0.3: J9.03 11.836,52.172 73.304,52.172 v1(75.184,50.292)
ETH_RST: IC5.37 J9.05 | length 76.3
  Top Layer w0.3: v1(74.346,47.117) 75.394,46.069 IC5.37
  Bottom Layer w0.3: J9.05 9.398,54.356 71.984,54.356 75.108,51.232 75.387,51.232 75.819,50.8 75.819,48.59 v1(74.346,47.117)
GND: C1.N C2.N C3.N C4.N C5.1 C6.1 C7.1 C8.1 C9.1 C10.1 C11.N C12.N C13.N C14.N C15.N C16.N C17.N C18.1 C19.2 C20.2 C21.1 C24.1 C25.2 C26.2 C27.2 C28.2 C29.1 D2.2 D3.NEG D4.2 D5.K D6.K D7.K D8.1 IC1.3 IC1.5 IC1.T1 IC1.T2 IC2.3 IC2.5 IC2.6 IC3.15 IC4.5 IC5.7 J1.01 J2.5 J4.4 J4.Shell J5.5 J6.3 J7.5 J8.6 J8.10 J8.11 J8.12 J8.13 J9.07 R12.1 R13.1 R24.2 SW1.1 U1.1 U2.1 VR1.1 VR1.2 | length 746.1
  Top Layer w0.3: J9.07 5.715,54.508 16.887,65.68 U1.1 16.887,60.325 17.204,60.008 20.764,60.008 21.082,60.325 21.082,62.23 21.524,62.672 D6.K 28.104,62.672 ; J1.01 11.963,99.187 12.217,98.933 D5.K ; J8.12 31.901,9.246 31.651,9.496 J8.10 ; C16.N 33.568,97.028 IC2.6 42.799,91.821 42.672,91.694 42.672,87.681 ; C24.1 36.184,19.05 36.501,18.732 J8.6 36.501,14.046 36.476,14.021 J8.10@32.354,14.021 ; C15.N 48.895,60.412 SW1.1@48.895,55.677 ; IC2.5 46.072,85.09 45.754,84.772 42.989,84.772 42.672,85.09 IC2.3 42.672,87.681 ; J8.13 47.601,9.144 47.151,9.594 47.151,11.481 ; SW1.1 SW1.1@48.895,55.677 ; J4.Shell@55.068,10.539 55.068,10.516 51.074,10.516 47.396,14.193 J8.11 47.151,11.481 ; C28.2 C27.2 55.524,37.465 55.499,37.49 C7.1 ; C26.2 C25.2 62.484,54.991 VR1.1 ; D3.NEG 77.787,88.889 78.232,88.444 ; J4.Shell@67.868,10.539 67.868,8.599 67.894,8.572 78.321,8.572 78.638,8.89 78.638,16.51 IC4.5 80.048,16.51 80.366,16.192 80.366,9.207 80.962,8.611 83.82,8.611 89.662,14.453 ; IC5.7 62.162,40.517 61.722,40.957 C9.1 60.249,42.418 60.122,42.291 C10.1 C7.1 ; VR1.2 69.977,74.462 C1.N 75.717,80.202 75.717,87.122 75.743,87.147 78.207,87.147 78.232,87.122 ; IC1.T1 IC1.T2 78.232,88.444 ; R24.2 86.558,27.94 C29.1 ; J6.3 89.662,12.907 89.662,14.453 ; C3.N 89.586,93.737 D2.2 88.468,85.979 87.528,86.919 82.769,86.919 IC1.5 81.632,84.549 81.28,84.197 78.388,84.197 78.232,84.353 IC1.3 78.232,87.122 ; IC3.15 94.894,28.702 94.132,29.464 C18.1 91.669,29.464 90.145,27.94 C29.1 ; C20.2 97.79,17.97 97.472,17.653 C19.2 91.416,17.653 91.313,17.55 R13.1 89.662,14.453 ; R12.1 C5.1 C6.1 99.187,62.524 C4.N 97.282,44.737 96.299,43.754 D7.K 92.456,38.1 91.576,37.22 87.312,37.22 86.991,36.898 D8.1 86.991,33.647 88.646,31.992 88.646,29.032 88.265,28.651 87.503,28.651 C29.1 ; C21.1 111.379,30.797 111.697,30.48 J5.5 116.078,27.94 J7.5 ; 28.104,62.672 29.21,62.672 29.591,63.053 29.591,70.445 C13.N 28.702,76.543 31.077,78.918 D4.2 34.29,83.464 34.608,83.782 38.849,83.782 40.157,85.09 40.157,87.681 40.183,87.706 42.647,87.706 42.672,87.681 ; 28.104,62.672 31.746,59.03 U2.1 31.746,51.86 31.917,51.689 C14.N 31.917,46.7 30.201,44.983 30.201,15.59 31.598,14.193 J8.10 ; J8.10 32.182,14.193 J8.10@32.354,14.021 ; J8.10@32.354,14.021 34.894,11.481 47.151,11.481 ; SW1.1@48.895,55.677 47.879,55.677 47.854,55.651 47.854,42.697 48.26,42.291 C8.1 C7.1 ; 78.232,87.122 78.232,88.444
  Bottom Layer w0.3: J1.01 13.502,95.845 C16.N ; C12.N 22.907,77.129 C13.N 55.499,71.334 59.269,67.564 ; C15.N 48.855,67.564 59.269,67.564 ; J4.Shell@55.068,10.539 55.068,10.516 61.671,10.516 64.405,13.249 J4.4 67.319,13.249 67.868,12.7 J4.Shell@67.868,10.539 ; C11.N 60.515,81.81 D3.NEG ; VR1.1 VR1.2 ; J6.3 115.76,10.16 116.078,9.842 J7.5 ; C3.N 95.29,99.441 J2.5 ; C4.N 91.44,60.619 91.313,60.746 C2.N 83.733,62.484 VR1.2 ; 59.269,67.564 C17.N 64.349,62.484 VR1.2
NetC20_1: C20.1 IC3.2 | length 6.9
  Top Layer w0.3: C20.1 100.076,28.258 100.52,28.702 IC3.2
NetC21_2: C21.2 IC3.6 | length 17.7
  Top Layer w0.3: IC3.6 100.635,33.782 100.192,34.224 100.192,37.301 100.228,37.337 103.048,37.337 105.206,35.179 110.998,35.179 111.379,35.56 C21.2
NetC22_1: C22.1 IC3.3 | length 6.3
  Top Layer w0.3: IC3.3 102.28,29.337 C22.1
NetC22_2: C22.2 IC3.1 | length 6.2
  Top Layer w0.3: IC3.1 104.673,27.432 105.054,27.051 C22.2
NetC23_1: C23.1 IC3.5 | length 15.1
  Top Layer w0.3: IC3.5 100.647,32.512 99.772,33.387 99.772,37.719 99.811,37.757 103.238,37.757 104.673,36.322 C23.1
NetC23_2: C23.2 IC3.4 | length 17.3
  Top Layer w0.3: IC3.4 102.667,31.242 102.692,31.267 102.692,34.432 102.667,34.457 100.649,34.457 100.612,34.493 100.612,36.881 100.649,36.917 102.641,36.917 102.678,36.881 102.678,36.321 104.963,34.036 C23.2
NetC25_1: C25.1 IC5.2 Y1.2 | length 18.8
  Top Layer w0.3: C25.1 67.691,51.943 Y1.2 64.592,51.181 63.779,50.368 63.779,46.736 67.498,43.017 IC5.2
NetC26_1: C26.1 IC5.3 Y1.1 | length 12.9
  Top Layer w0.3: C26.1 67.367,48.895 Y1.1 69.367,49.067 69.367,42.542 69.342,42.517 IC5.3
NetC27_1: C27.1 IC5.8 Y2.2 | length 13.3
  Top Layer w0.3: C27.1 62.384,37.465 Y2.2 63.754,38.24 65.531,40.017 IC5.8
NetC28_1: C28.1 IC5.9 Y2.1 | length 18.1
  Top Layer w0.3: C28.1 60.552,34.417 Y2.1 65.634,33.095 65.634,39.111 66.04,39.517 IC5.9
NetC29_2: C29.2 D8.3 IC5.27 R17.2 R24.1 | length 27.2
  Top Layer w0.3: v1(75.692,39.445) 76.12,39.017 IC5.27 ; C29.2 86.304,30.226 R24.1 R17.2 85.978,38.538 D8.3
  Bottom Layer w0.3: v1(75.692,39.445) 83.077,39.445 R17.2
NetD2_1: D2.1 IC1.2 L1.1 | length 24.5
  Top Layer w0.3: IC1.2 76.532,83.82 ; L1.1 80.01,76.962 79.553,77.419 79.553,80.784 76.532,83.805 76.532,83.82 ; D2.1 86.436,83.82 86.055,83.439 76.913,83.439 76.532,83.82
NetD3_AC1: D3.AC1 J3.2 | length 8.2
  Top Layer w0.3: J3.2 57.23,93.026 57.394,92.862 D3.AC1
NetD3_AC2: D3.AC2 J3.1 | length 8.2
  Top Layer w0.3: J3.1 62.23,93.228 62.494,92.964 D3.AC2
NetD4_1: D4.1 IC2.2 L2.1 | length 21
  Top Layer w0.3: D4.1 35.712,75.768 36.703,76.759 ; L2.1 38.23,74.905 38.198,74.905 36.703,74.93 36.703,76.759 ; IC2.2 40.972,84.431 39.726,83.185 37.02,83.185 36.703,82.867 36.703,76.759
NetD5_A: D5.A R8.2 | length 12.3
  Top Layer w0.3: D5.A 15.936,96.408 22.174,90.17 R8.2
NetD6_A: D6.A R7.2 | length 3.4
  Top Layer w0.3: R7.2 23.952,61.214 24.394,60.772 D6.A
NetD7_A: D7.A R23.1 | length 5
  Top Layer w0.3: R23.1 88.773,44.628 89.799,45.654 D7.A
NetIC1_4: IC1.4 R6.1 VR1.3 | length 33.5
  Top Layer w0.3: VR1.3 72.517,62.535 70.841,64.211 70.841,67.666 72.136,68.961 R6.1 72.136,71.425 v1(78.232,77.521) ; IC1.4 v1(79.932,87.376)
  Bottom Layer w0.3: v1(78.232,77.521) 78.232,85.676 v1(79.932,87.376)
NetIC3_7: IC3.7 J7.2 | length 35.5
  Top Layer w0.3: IC3.7 102.692,35.052 106.07,31.674 108.28,31.674 108.839,31.115 108.839,10.224 107.778,9.163 107.778,6.353 107.848,6.283 J7.2
NetIC3_8: IC3.8 J7.3 | length 38.8
  Top Layer w0.3: IC3.8 102.083,36.322 105.842,32.563 108.902,32.563 109.271,32.194 109.271,9.652 108.198,8.579 108.198,6.782 108.89,6.09 108.89,5.283 109.22,4.953 J7.3
NetIC3_13: IC3.13 J5.3 | length 25.5
  Top Layer w0.3: IC3.13 97.231,31.242 98.222,32.233 v1(98.222,34.214)
  Bottom Layer w0.3: v1(98.222,34.214) 99.978,35.97 J5.3
NetIC3_14: IC3.14 J5.2 | length 32.4
  Top Layer w0.3: v1(94.932,30.759) 94.932,30.29 95.25,29.972 IC3.14
  Bottom Layer w0.3: v1(94.932,30.759) 97.599,33.426 116.002,33.426 117.196,34.62 119.062,34.62 119.659,35.217 119.659,37.669 J5.2
NetIC4_6: IC4.6 J6.2 R11.2 R14.2 | length 14.9
  Top Layer w0.3: IC4.6 80.213,17.78 80.57,17.423 R11.2 ; J6.2 81.915,13.64 82.169,13.894 R11.2 ; R14.2 84.125,17.55 83.998,17.423 R11.2
NetIC4_7: IC4.7 J6.1 R13.2 R14.1 | length 25
  Top Layer w0.3: J6.1 76.915,18.732 77.233,19.05 IC4.7 80.124,19.05 80.442,19.367 80.442,21.298 80.962,21.819 85.954,21.819 85.979,21.793 R14.1 R13.2
NetIC5_10: IC5.10 R25.1 SW1.2 | length 32.8
  Top Layer w0.3: SW1.2 48.895,52.745 49.212,53.062 R25.1 54.762,53.062 54.788,53.037 v1(54.788,47.219) ; v1(66.675,38.811) 66.881,39.017 IC5.10
  Bottom Layer w0.3: v1(54.788,47.219) 63.195,38.811 v1(66.675,38.811)
NetIC5_30: IC5.30 R23.2 | length 15.9
  Top Layer w0.3: IC5.30 77.826,40.517 v1(78.029,42.342) ; v1(81.305,45.618) 88.748,45.618 R23.2
  Bottom Layer w0.3: v1(78.029,42.342) v1(81.305,45.618)
NetJ2_3: J2.3 R10.2 R12.2 | length 31.2
  Top Layer w0.3: R12.2 108.052,73.66 108.076,73.636 R10.2 109.982,95.758 J2.3
RS485_EN: IC4.2 IC4.3 IC5.25 | length 23.4
  Top Layer w0.3: IC4.3 IC4.2 75.717,19.05 76.656,19.988 76.656,31.825 76.581,31.9 76.581,38.017 IC5.25
SCL_3.3V: IC5.45 Q1.2 R3.2 R16.2 | length 90.5
  Top Layer w0.3: R3.2 12.192,77.114 13.523,78.445 ; Q1.2 13.523,78.445 ; v1(13.97,73.863) 13.523,74.31 13.523,78.445 ; IC5.45 71.394,46.533 73.684,48.823 R16.2 73.684,51.435 74.421,52.172 v1(75.184,52.172)
  Bottom Layer w0.3: v1(13.97,73.863) 32.664,55.169 72.187,55.169 v1(75.184,52.172)
SCL_5V: J1.03 Q1.3 R2.2 | length 24.3
  Top Layer w0.3: J1.03 7.036,97.231 7.036,89.218 7.531,88.722 9.423,88.722 10.871,90.17 R2.2 12.724,86.74 12.573,86.589 Q1.3
SD_CS: IC5.23 J8.2 R22.1 | length 68.2
  Top Layer w0.3: J8.2 40.926,16.485 50.825,16.485 57.455,23.114 57.48,24.384 R22.1 58.65,22.987 65.864,15.773 74.244,15.773 74.27,15.799 74.27,17.094 74.244,17.12 72.212,17.12 72.187,17.145 72.187,19.634 72.212,19.66 74.498,19.66 74.894,20.055 IC5.23
SD_DET: IC5.24 J8.9 R18.1 | length 62.6
  Top Layer w0.3: R18.1 R18.1@31.393,24.359 ; v1(32.893,24.359) R18.1@31.393,24.359 ; J8.9 33.201,17.472 31.393,19.28 R18.1@31.393,24.359 ; IC5.24 75.616,35.795 v1(75.616,30.785)
  Bottom Layer w0.3: v1(32.893,24.359) 43.852,24.359 48.553,29.059 73.89,29.059 v1(75.616,30.785)
SDA_3.3V: IC5.46 Q2.2 R4.2 R15.2 | length 93.6
  Top Layer w0.3: R4.2 5.358,79.983 Q2.2 5.4,78.674 v1(5.918,78.156) ; v1(64.338,55.804) 67.109,55.804 70.894,52.019 70.894,49.686 ; IC5.46 70.894,49.686 ; R15.2 73.684,52.476 70.894,49.686
  Bottom Layer w0.3: v1(5.918,78.156) 10.77,78.156 33.122,55.804 v1(64.338,55.804)
SDA_5V: J1.04 Q2.3 R5.2 | length 24.1
  Top Layer w0.3: Q2.3 1.524,77.724 1.524,80.607 5.231,84.314 R5.2 5.231,96.496 J1.04
SIM_RST: IC5.31 J2.2 R9.1 | length 82.4
  Top Layer w0.3: v1(75.24,40.741) 75.516,41.017 IC5.31 ; v1(112.344,71.526) 112.674,71.526 114.046,72.898 R9.1 115.887,73.636 116.205,73.954 J2.2
  Bottom Layer w0.3: v1(75.24,40.741) 81.559,40.741 v1(112.344,71.526)
SPI1_MISO: IC5.17 J9.08 | length 91.1
  Top Layer w0.3: IC5.17 71.894,35.65 v1(72.136,31.293)
  Bottom Layer w0.3: J9.08 4.47,51.918 2.54,51.918 2.134,51.511 2.134,46.038 15.38,32.791 70.637,32.791 v1(72.136,31.293)
SPI1_MOSI: IC5.18 J9.06 | length 73.3
  Top Layer w0.3: v1(69.698,38.405) 72.072,38.405 72.394,38.083 IC5.18
  Bottom Layer w0.3: J9.06 11.43,47.498 53.543,47.498 55.931,45.11 56.236,45.11 65.786,35.56 66.853,35.56 v1(69.698,38.405)
SPI1_SCK: IC5.42 J9.02 | length 62.5
  Top Layer w0.3: v1(72.386,46.457) 72.894,45.949 IC5.42
  Bottom Layer w0.3: J9.02 52.375,50.673 55.397,47.65 71.192,47.65 v1(72.386,46.457)
SPI2_MISO: IC5.21 J8.7 R19.1 | length 70.5
  Top Layer w0.3: J8.7 v1(35.401,17.399) ; R19.1 40.489,23.724 v1(41.961,23.724) ; IC5.21 73.894,37.465 73.919,37.49 75.755,37.49 76.098,37.148 76.098,31.394 76.236,31.257 76.236,30.175 75.616,29.555 v1(75.616,28.626)
  Bottom Layer w0.3: v1(41.961,23.724) 41.726,23.724 v1(35.401,17.399) 37.724,17.399 44.313,23.988 59.764,23.988 64.402,28.626 v1(75.616,28.626)
SPI2_MOSI: IC5.15 J8.3 R21.1 | length 51.8
  Top Layer w0.3: J8.3 39.801,17.145 40.118,17.462 48.412,17.462 49.681,18.731 v1(49.681,22.123) R21.1 ; v1(70.739,25.07) 70.739,33.612 IC5.15
  Bottom Layer w0.3: v1(49.681,22.123) 67.793,22.123 v1(70.739,25.07)
SPI2_SCK: IC5.22 J8.5 R20.1 | length 74.6
  Top Layer w0.3: J8.5 37.601,16.494 v1(37.821,16.713) ; R20.1 44.907,24.384 44.933,24.359 v1(44.933,23.368) ; v1(71.882,27.864) 74.394,30.376 IC5.22
  Bottom Layer w0.3: v1(37.821,16.713) 44.069,22.962 66.98,22.962 66.98,23.368 ; v1(44.933,23.368) 66.98,23.368 ; v1(71.882,27.864) 67.386,23.368 66.98,23.368
SWCLK: IC5.36 J4.3 | length 45.2
  Top Layer w0.3: J4.3 64.459,15.24 75.248,15.24 75.565,15.557 75.565,17.983 77.495,19.914 77.495,36.373 77.876,36.754 77.876,38.728 79.284,40.136 79.284,42.287 78.054,43.517 IC5.36
SWDIO: IC5.35 J4.2 | length 68
  Top Layer w0.3: v1(75.743,38.151) 74.295,39.599 74.295,41.391 75.921,43.017 IC5.35
  Bottom Layer w0.3: J4.2 64.085,16.866 82.804,16.866 90.653,24.714 90.653,34.087 86.589,38.151 v1(75.743,38.151)
UART1_RX: IC5.32 J2.4 | length 88.7
  Top Layer w0.3: v1(75.628,41.681) 75.792,41.517 IC5.32
  Bottom Layer w0.3: v1(75.628,41.681) 93.078,59.131 98.108,59.131 98.552,59.576 98.552,72.06 93.65,76.962 93.65,95.504 95.25,97.104 108.788,97.104 J2.4
UART1_TX: IC5.29 R10.1 | length 55.4
  Top Layer w0.3: IC5.29 78.206,40.017 v1(78.257,40.069) ; v1(104.851,52.045) 104.851,68.452 107.036,70.636 R10.1
  Bottom Layer w0.3: v1(78.257,40.069) 81.623,40.069 93.599,52.045 v1(104.851,52.045)
UART4_RX: IC4.1 IC5.12 | length 20
  Top Layer w0.3: IC5.12 68.478,38.017 69.291,37.204 69.291,24.232 72.796,20.726 72.796,20.32 IC4.1
UART4_TX: IC4.4 IC5.11 | length 27.7
  Top Layer w0.3: IC5.11 67.498,38.517 67.081,38.1 67.081,19.177 69.748,16.51 IC4.4
USART2_RX: IC3.12 IC5.14 | length 32.7
  Top Layer w0.3: IC5.14 v1(70.394,37.719) ; v1(90.018,33.452) 90.957,32.512 IC3.12
  Bottom Layer w0.3: v1(70.394,37.719) 69.291,36.616 69.291,34.29 69.789,33.792 76.385,33.792 76.674,33.504 89.966,33.504 v1(90.018,33.452)
USART2_TX: IC3.11 IC5.13 | length 31
  Top Layer w0.3: IC5.13 69.894,35.389 v1(69.926,35.357) ; v1(93.459,33.782) IC3.11
  Bottom Layer w0.3: v1(69.926,35.357) 73.355,38.786 88.456,38.786 v1(93.459,33.782)
USART3_RX: IC3.9 IC5.19 | length 33
  Top Layer w0.3: IC5.19 72.894,32.402 v1(72.898,32.398) ; v1(89.357,30.886) 89.357,32.032 88.978,32.412 88.978,34.492 90.086,35.6 94.096,35.6 94.818,36.322 IC3.9
  Bottom Layer w0.3: v1(72.898,32.398) 81.369,32.398 82.88,30.886 v1(89.357,30.886)
USART3_TX: IC3.10 IC5.16 | length 32.3
  Top Layer w0.3: v1(71.394,33.147) IC5.16 ; v1(89.992,32.182) 89.398,32.776 89.398,34.036 90.414,35.052 IC3.10
  Bottom Layer w0.3: v1(71.394,33.147) 71.458,33.084 81.623,33.084 83.16,31.547 89.357,31.547 v1(89.992,32.182)
pads on no net: IC5.1 IC5.26 IC5.28 IC5.33 IC5.34 IC5.38 IC5.39 IC5.40 IC5.43 IC5.44 IC5.47 IC5.48 J4.1 J5.1 J5.4 J5.6 J5.7 J5.8 J5.9 J5.M1 J5.M2 J7.1 J7.4 J7.6 J7.7 J7.8 J7.9 J7.M1 J7.M2 J8.1 J8.8 J8.MH1 J8.MH2 J9.01 J9.09

## Polygon pours and split planes (outlines as drawn)
GND on Bottom Layer "GND_L02_P000" (solid, pour order 0): 0,0 0,101.6 127,101.6 127,0
GND on Top Layer "GND_L01_P001" (solid, pour order 1): 0,0 0,101.6 127,101.6 127,0

## Keep-outs
Keep-Out Layer:
  the board outline again, w1.2

## Text inside footprints (layer, text, board x,y; h text height)
D5: Mechanical 13 "+" at 16.819,100.033 h0.8
D6: Mechanical 13 "+" at 26.881,59.889 h0.8 r270
D7: Mechanical 13 "+" at 91.356,46.537 h0.8 r90